# Altium PCB Ultrasonic___PCB.PcbDoc
Units mm, origin at the board's own origin, x right, y up, seen from the top; angles counter-clockwise.
Board outline 61 x 20.07 mm, 2 copper layers (Top Layer, Bottom Layer); 13 components, 9 nets, 51 pads, 7 vias.
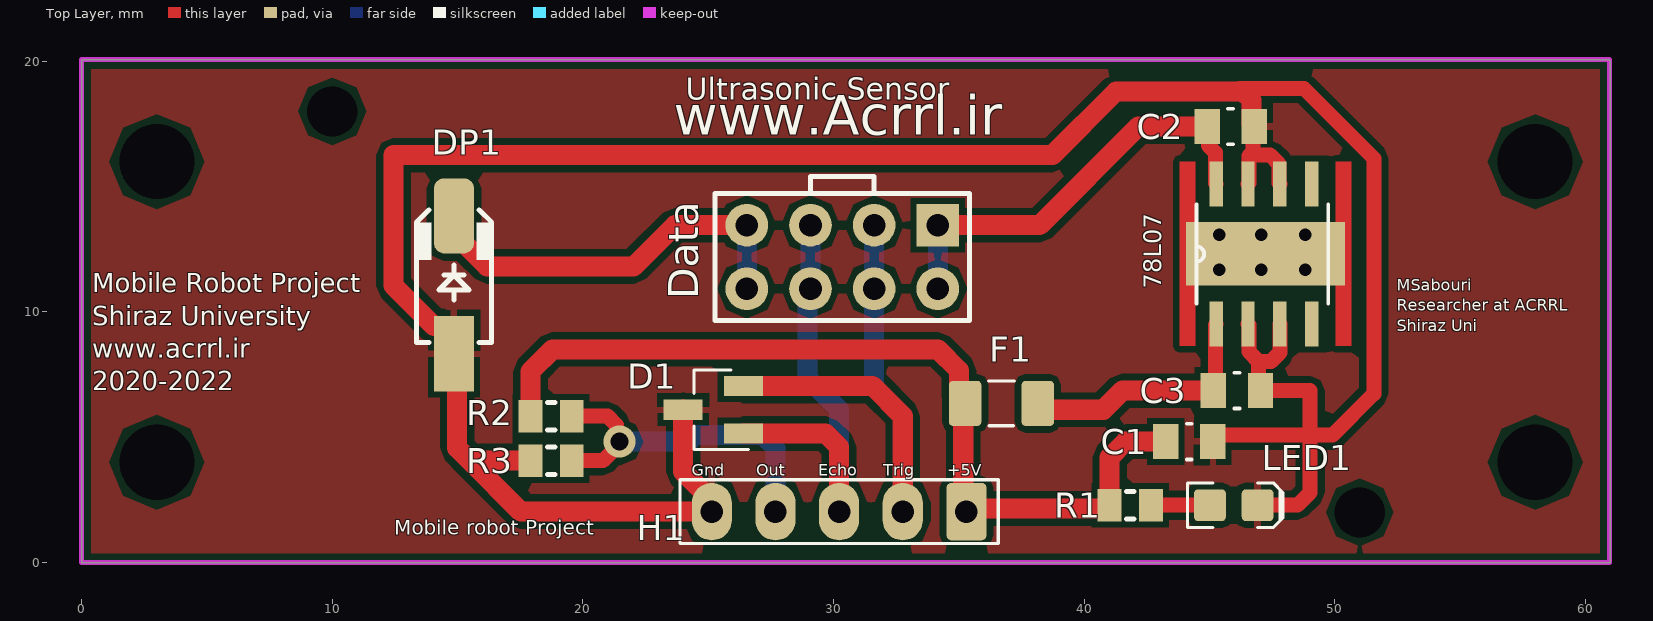
[diagram p0: Top Layer view]
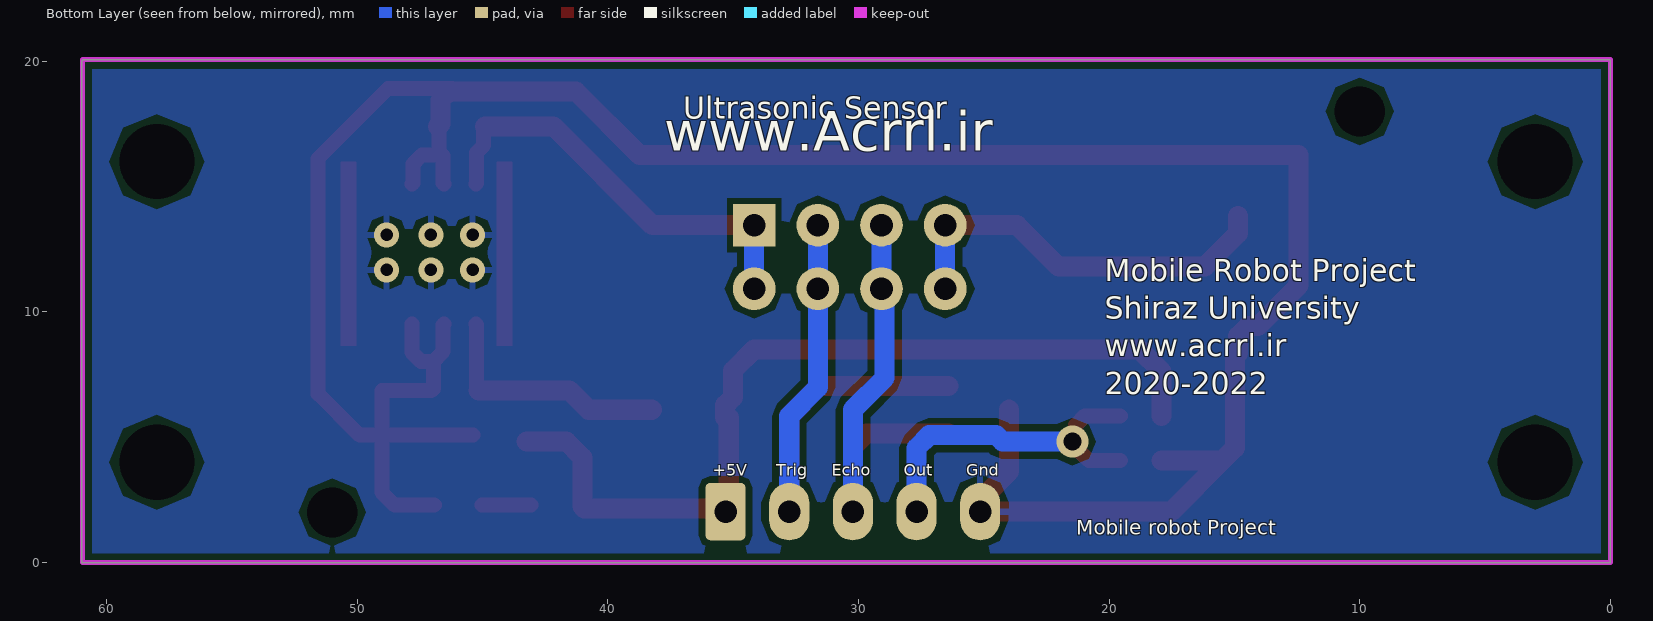
[diagram p1: Bottom Layer view, seen from below]

## Layer stack, top to bottom
Top Solder: solder mask 0.0102, Solder Resist, Dk 3.5
Top Layer: signal copper 0.0356
Dielectric 1: dielectric 0.32, FR-4, Dk 4.8
Bottom Layer: signal copper 0.0356
Bottom Solder: solder mask 0.0102, Solder Resist, Dk 3.5

## Board outline
0,0 61.001,0 61.001,20 60.96,20.066 0,20.066 0.001,20

## Design rules (kind name [scope] priority, off if disabled: settings)
Clearance [All] p1: gap=0.25 ignorepadtopadclearanceinfootprint=FALSE
PolygonConnect [All] p1: connectstyle=Relief reliefconductorwidth=0.254 reliefentries=4 polygonreliefangle="90 Angle" airgapwidth=0.254
RoutingVias [All] p1: holewidth=0.711 width=1.27 viastyle="Through Hole" minholewidth=0.711 minwidth=1.27 maxholewidth=0.711 maxwidth=1.27
SolderMaskExpansion [All] p1: expansion=0.102 istentingtop=FALSE
Width [All] p1: maxlimit=1 minlimit=0.254 preferedwidth=0.5
30 further rules are at their usual default settings.

## Components (designator, comment, footprint, x,y, rotation, side; value= is the part's Value field where it differs from the comment)
78L07 "" 78L05CD15V5V_LIB 44.831,12.319 r90 top (schematic designator U1)
C1 "100nF" 0805 44.196,4.826 r180 top value=470nF
C2 "0.33uF" 0805 45.847,17.399 r180 top value=470nF
C3 "0.33uF" 0805 46.101,6.858 r180 top value=470nF
D1 "SM712" psm712 26.403,7.046 r180 top
Data "Header 4X2" HDR2X4 34.163,13.462 r180 top (schematic designator P1)
DP1 "1N5819" 430X270D 14.859,11.176 r90 top
F1 "Slow-blow" RESC3216X70N 36.703,6.35 r180 top value=100mA
H1 "Programmer" HDR1X5_2.54MMP 35.306,2.032 r180 top
LED1 "Green" LED-0805-K 45.974,2.286 r0 top
R1 "330" "RES 0805 (2012X06L)" 42.671,2.286 r180 top
R2 "0" "RES 0805 (2012X06L)" 17.907,5.842 r0 top
R3 "0" "RES 0805 (2012X06L)" 17.907,4.064 r0 top

## Footprints (in the part's own frame and the unit in brackets; to place one, negate y for a bottom-side part, rotate by r counter-clockwise, add the part's x,y. Pads: shape width x height; smd on the part's side, far side on the other; paste and mask are expansions set on the pad)
78L05CD15V5V_LIB [mil]
  rect 70.87x21 smd: 1(-110.35,-17.44) 2(-110.35,-67.44) 3(-110.35,-117.44) 4(-110.35,-167.44) 5(109.65,-167.44) 6(109.65,-117.44) 7(109.65,-67.44) 8(109.65,-17.44)
  rect 100x250 smd paste+0 mask+0: 7(0,-95)
  Top Layer region: -145.01,-230 144.99,-230 144.99,-205 -145.01,-205
  Top Layer region: -145.01,15 144.99,15 144.99,40 -145.01,40
  Top Layer region: 85,105
  silkscreen extent -78,-193 78,14
430X270D [mm] "SMA Molded Diode, 2-Leads, Body 4.3x2.7mm"
  rect 3x1.6 smd: 1(-2.843,0)
  rrect50% 3x1.6 smd: 2(2.657,0)
  silkscreen extent -2.4,-1.5 2.9,1.5, body extent -2.75,-1.4 2.75,1.4, height 2.6
0805 [mil]
  rect 40x55 smd: 1(-37,0) 2(37,0)
  silkscreen extent -4,-28 4,28, body extent -47,-28 47,28, height 24
HDR1X5_2.54MMP [mm] "Connector; Header; 5 Position 0.100\" pitch"
  rrect25% 1.6x2.3 hole 0.9: 1(0,0)
  oval 1.6x2.3 hole 0.9: 2(2.54,0) 3(5.08,0) 4(7.62,0) 5(10.16,0)
  silkscreen extent -1.27,-1.27 11.43,1.27
HDR2X4 [mm] "Connector; Header; 4x2 Position"
  rect 1.7x1.7 hole 0.9: 1(0,0)
  round 1.7 hole 0.9: 2(0,2.54) 3(2.54,0) 4(2.54,2.54) 5(5.08,0) 6(5.08,2.54) 7(7.62,0) 8(7.62,2.54)
  silkscreen extent -1.27,-1.27 8.89,3.81
LED-0805-K [mil]
  round 20 on Mech15: 0(0,0)
  rrect25% 50x50 smd: A(-37.5,0) K(37.5,0)
  Top Layer pour cut-out: -15,30 15,30 15,-30 -15,-30
  silkscreen extent -72,-35 77,35, body extent -39,-25 39,25, height 31
psm712 [mil]
  rect 61.42x31.5 smd: 1(0,74.8) 2(0,0) 3(94.48,37.4)
  silkscreen extent -8,-25 77,100
"RES 0805 (2012X06L)" [mm] "Chip Resistor, 2-Leads, Body 2.0x1.3mm, IPC High Density _ (0.100 W)"
  rect 0.95x1.3 smd: 1(0,0) 2(1.65,0)
  silkscreen extent 0.67,-0.55 0.97,0.55, body extent -0.19,-0.63 1.84,0.64, height 0.6
RESC3216X70N [mm] "Chip Resistor, Body 3.2x1.6mm, EIA 1206, IPC Medium Density"
  round 0.508 on Mech15: 0(0,0)
  rrect25% 1.3x1.8 smd: 1(-1.45,0) 2(1.45,0)
  silkscreen extent -0.51,-0.89 0.51,0.89, body extent -1.62,-0.82 1.63,0.83, height 0.69

## Part data
78L07: library part "MC78L05ACDG 5V Regulator"
C1 C2 C3: library part "CAP 470nF 50V", "CAP CER 0.1UF 50V X7R 0805", Package=0805, Rating=50V, Tolerance=10%
D1: library part SM712.TC, "Asymmetrical TVS Diode for  Extended Common-Mode RS-485", Manufacturer=SEMTECH, Operating Temp="-55 to 125 °C", Storage Temp="-55 to 150 °C", Manufacture Part #=SM712.TC
Data: "Header, 4-Pin, Dual row", LatestRevisionDate=17-Jul-2002, LatestRevisionNote="Re-released for DXP Platform.", Publisher="Altium Limited"
DP1: "Schottkey Rectifiers", Data=16-12-2016, Designer="Abbas Basereh"
F1: library part FUSE_160mA_1206, "Fuse 160mA 63VDC 1206 SMD", Manufacturer 1="Holly Fuse", Manufacturer Part Number 1=12T-0160L, Package / Case="1206 (3216 metric)", Ratings="160mA; 63VDC; slow-blow", SCDType=spec
H1: library part Header5P, "Header 5-pin"
LED1: library part LED_SMD_Green_0805_6mcd, "LED, 0805 SMD, Green", Manufacturer 1=LITE-ON, Manufacturer Part Number 1=LTST-C171GKT, Package / Case=0805, Ratings="6 mcd; 569 nm", Supplier Part Number 1=160-1423-1-ND, Color=Green, Material=GaP, SCDType=source, Supplier 1=Digi-Key
R1 R2 R3: library part Resistor, "Resistor", Power="1/8 W", Tolerance=5%

## Free pads (board coordinates)
  round 0 hole 3: 2(3.001,4) 2(3.001,16) 2(58.001,4) 2(58.001,16)
  round 0 hole 2: 2(10.001,18) 2(51.001,2)

## Via types
v1: diameter 1, hole 0.5, Top Layer to Bottom Layer, 6 vias
v2: diameter 1.27, hole 0.711, Top Layer to Bottom Layer, 1 vias

## Nets (pads, with @x,y where several pads share a name; then routed paths per layer and width w, separated by ;. In a path a pad name is that pad's centre, name@x,y a point inside that pad or via, vN(x,y) a via of type N, cw(c..) or ccw(c..) an arc to the next point about the centre after c; other vN are vias at no path point)
ECHO: D1.1 Data.5 Data.6 H1.3 | length 18.6
  Top Layer w0.8: D1.1 29.691,5.146 30.226,4.611 H1.3
  Bottom Layer w0.8: Data.5 Data.6 28.956,10.795 28.956,7.366 30.226,6.096 H1.3
GND: 78L07.2 78L07.3 78L07.6 78L07.7 C1.1 C2.1 C3.1 D1.3 DP1.1 H1.5 LED1.K R3.1 | length 108.3
  Top Layer w0.6: C1.1@45.39,5.08 49.022,5.08 ; 46.21,18.923 48.768,18.923 51.562,16.129 51.562,6.731 49.911,5.08 49.022,5.08 ; 78L07.2 46.577,9.483 46.577,8.414 46.965,8.026 ; 78L07.7@46.544,15.104 46.577,15.137 46.577,16.224 46.609,16.256 ; C2.1@46.736,17.45 46.736,16.383 46.609,16.256 ; LED1.K 48.514,2.286 49.022,2.794 49.022,5.08 ; 78L07.3 47.814,8.377 47.462,8.026 46.965,8.026 ; 78L07.6 47.781,15.137 47.781,15.905 47.429,16.256 46.609,16.256 ; 46.965,8.026 46.965,6.933 C3.1 49.022,6.858 49.022,5.08
  Top Layer w0.8: R3.1 15.494,4.064 ; D1.3 24.003,3.625 25.146,2.482 H1.5 17.526,2.032 15.494,4.064 ; C2.1 46.736,17.45 46.679,17.507 46.679,18.454 46.337,18.796 41.275,18.796 38.735,16.256 12.446,16.256 12.446,11.049 14.062,9.433 14.459,9.433 14.859,9.033 DP1.1 14.986,8.206 14.986,4.572 15.494,4.064
  other v1: 45.401,11.675 47.067,11.675 48.83,11.675 45.401,13.072 47.067,13.072 48.83,13.072
NetC3_2: 78L07.1 C3.2 F1.1 | length 9.9
  Top Layer w0.6: C3.2 45.241,6.937 45.241,9.483 78L07.1
  Top Layer w0.8: F1.1@38.24,6.096 40.767,6.096 41.529,6.858 C3.2
NetDP1_2: Data.7 Data.8 DP1.2 | length 16.2
  Top Layer w0.8: DP1.2 14.859,13.133 16.181,11.811 22.026,11.811 23.677,13.462 Data.7
  Bottom Layer w0.8: Data.8 Data.7
NetH1_4: H1.4 R2.2 R3.2 | length 14
  Top Layer w0.6: R3.2 20.802,4.064 21.463,4.725 v2(21.463,4.826) 21.335,4.954 21.335,5.491 20.983,5.842 R2.2
  Bottom Layer w0.8: v2(21.463,4.826) 24.257,4.826 24.511,5.08 27.178,5.08 27.686,4.572 H1.4
NetLED1_A: LED1.A R1.1 | length 1.9
  Top Layer w0.6: R1.1@43.078,2.286 LED1.A
TRIG: D1.2 Data.3 Data.4 H1.2 | length 22.6
  Top Layer w0.8: D1.2 31.562,7.046 32.766,5.842 H1.2
  Bottom Layer w0.8: Data.3 Data.4 31.623,6.985 32.766,5.842 H1.2
V5: C1.2 F1.2 H1.1 R1.2 R2.1 | length 35.7
  Top Layer w0.8: R2.1 17.907,7.62 18.796,8.509 34.163,8.509 35.012,7.66 35.012,6.591 35.325,6.278 F1.2@35.325,5.778 ; F1.2@35.179,5.778 35.179,2.159 H1.1 35.433,2.159 40.946,2.159 41.021,2.234 R1.2 41.021,4.191 41.656,4.826 C1.2
VCC: 78L07.8 C2.2 Data.1 Data.2 | length 17.4
  Top Layer w0.6: C2.2 44.958,17.348 44.958,16.637 45.241,16.354 45.241,15.137 78L07.8
  Top Layer w0.8: Data.1 38.227,13.462 42.164,17.399 C2.2
  Bottom Layer w0.8: Data.2 Data.1
pads on no net: 78L07.4 78L07.5 F1.0 LED1.0

## Polygon pours and split planes (outlines as drawn)
GND on Top Layer "GND_L02_P-001" (solid, pour order 0): 0,20.066 60.96,20.066 60.96,0 0,0
GND on Bottom Layer "GND_L02_P-001" (solid, pour order 1): 0,20.066 60.96,20.066 60.96,0 0,0

## Keep-outs
Keep-Out Layer:
  lines w0.2: 8.128,20.066 0,20.066 ; 0,20.066 0,0 60.96,0 60.96,20.066 0,20.066

## Silkscreen, mask and mechanical layers (free items; w line width, h text height)
Top Overlay:
  lines w0.2: 29.083,14.732 29.083,15.399 31.623,15.399 31.623,14.732
  text "Ultrasonic Sensor" at 24.098,18.174 h1.5
  text "www.Acrrl.ir" at 23.622,16.55 h2.7
  text "MSabouri / Researcher at ACRRL / Shiraz Uni" at 52.479,9.078 h0.8
  text "Mobile Robot Project / Shiraz University / www.acrrl.ir / 2020-2022" at 0.413,6.617 h1.3
  text "Gnd" at 24.344,3.308 h0.8
  text "Out" at 26.928,3.308 h0.8
  text "Echo" at 29.391,3.308 h0.8
  text "Trig" at 31.995,3.308 h0.8
  text "+5V" at 34.548,3.308 h0.8
  text "Mobile robot Project" at 12.474,0.899 h1
Bottom Overlay:
  text "Ultrasonic Sensor" at 36.989,17.412 h1.5
  text "www.Acrrl.ir" at 37.743,15.915 h2.7
  text "Mobile Robot Project / Shiraz University / www.acrrl.ir / 2020-2022" at 20.177,6.423 h1.5
  text "Gnd" at 25.694,3.308 h0.8
  text "Out" at 28.19,3.308 h0.8
  text "Echo" at 31.061,3.308 h0.8
  text "Trig" at 33.283,3.308 h0.8
  text "+5V" at 35.81,3.308 h0.8
  text "Mobile robot Project" at 21.308,0.899 h1

## Text inside footprints (layer, text, board x,y; h text height)
D1: Mechanical 15 "Q3" at 24.953,6.496 h0.5 r270